# Altium PCB 7Inc Module.PcbDoc (part 2 of 2)
Units mm, origin at the board's own origin, x right, y up, seen from the top; angles counter-clockwise.
Board outline 50 x 50 mm, 4 copper layers (L1, L2, L3, L4), stack 1.57 mm thick; 64 components, 58 nets, 230 pads, 121 vias.
Unrouted connection lines stored in the file: 274.
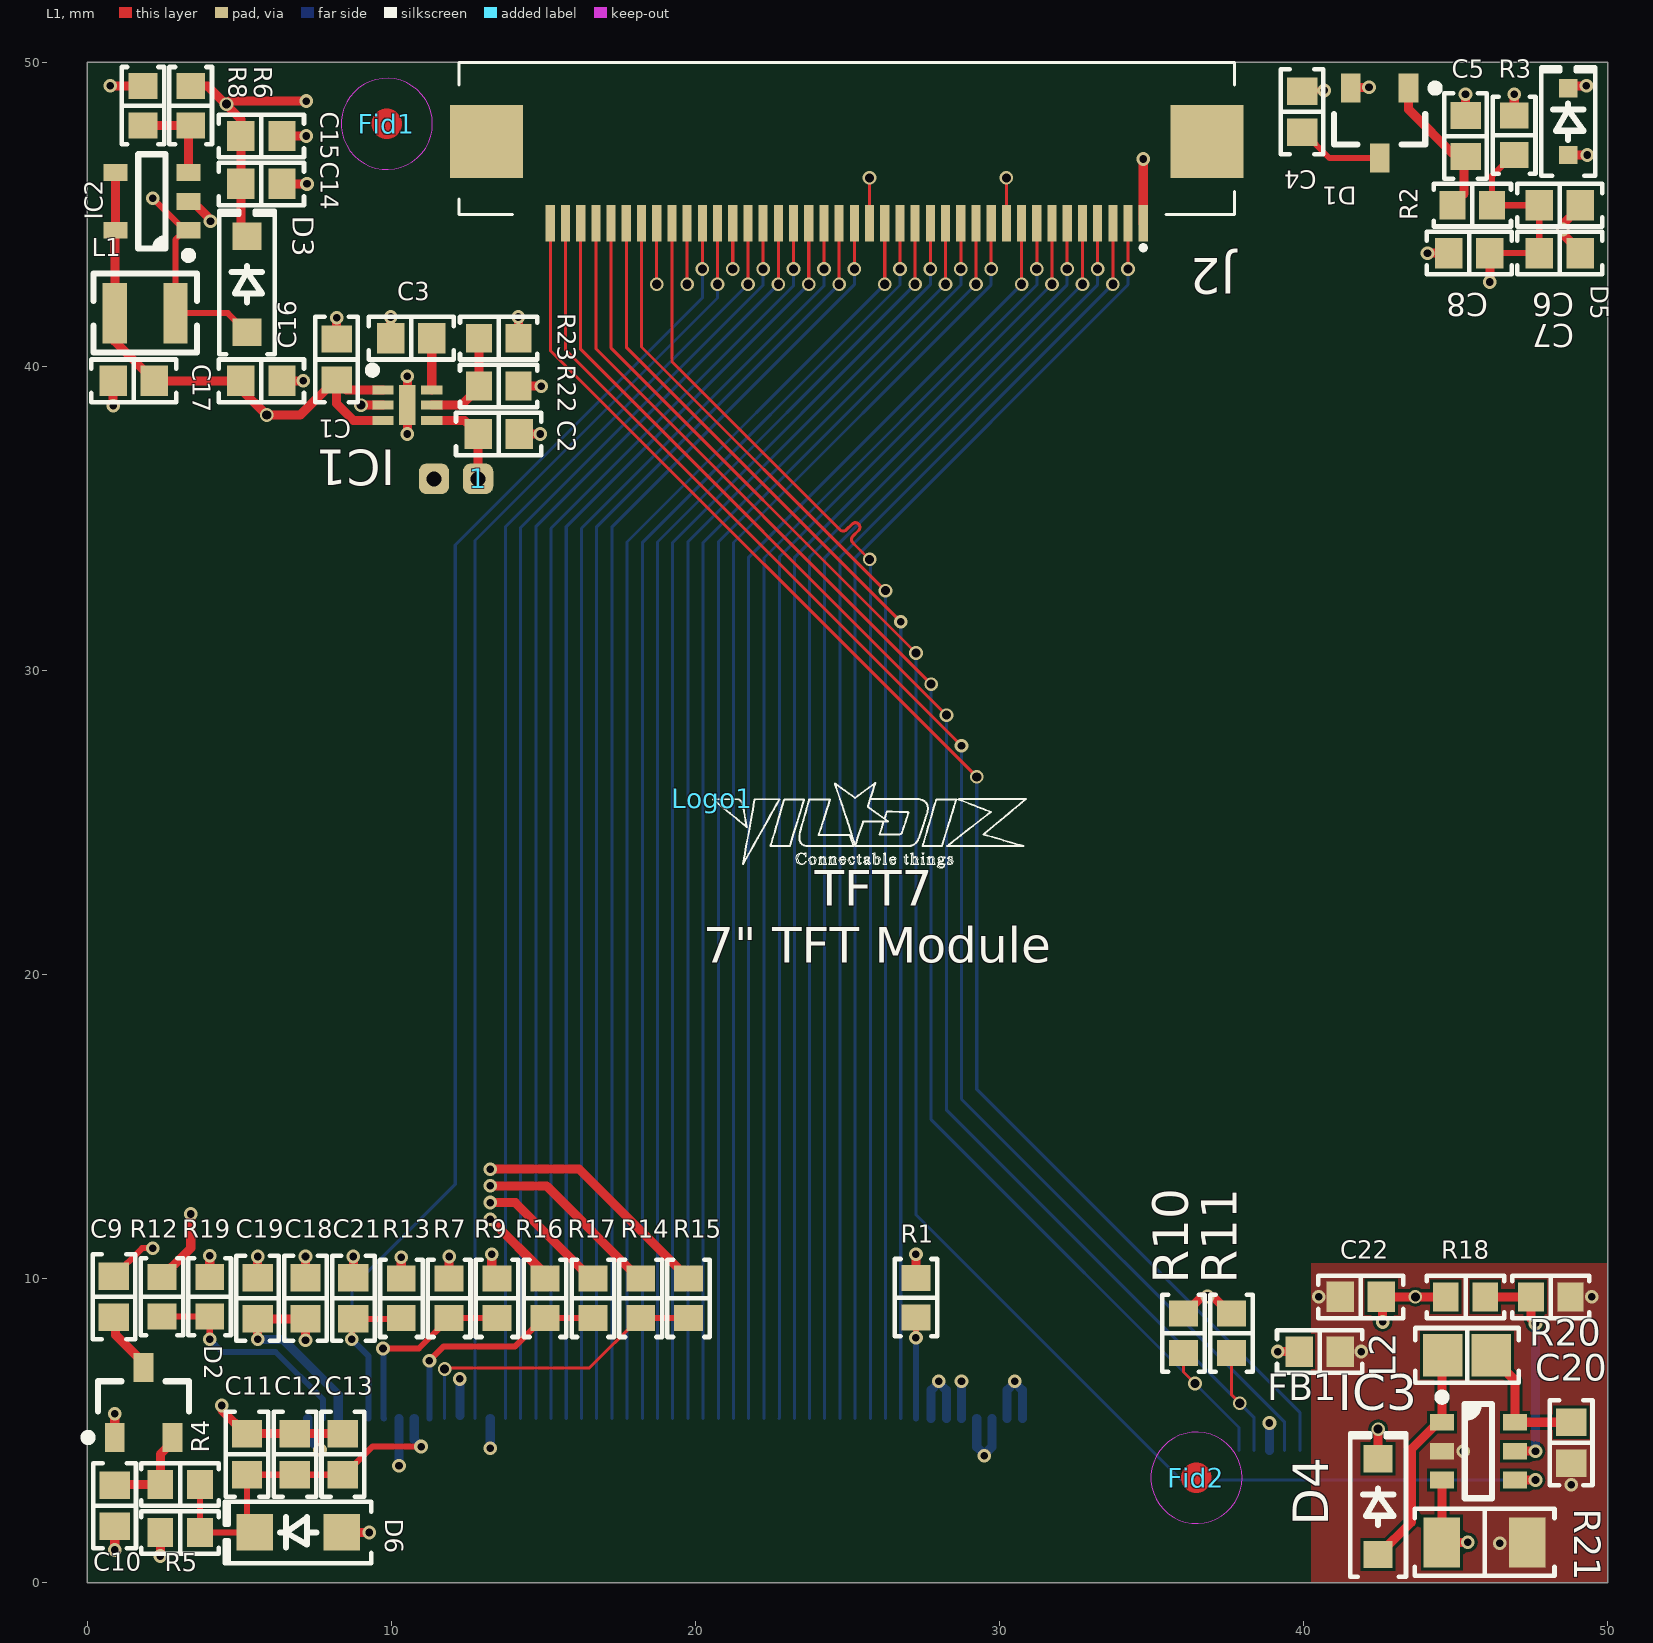
[diagram p0: L1 view]

## Part data (continued)
R3: library part Resistor_Chip, "Ceramic, SMT Capacitor", Case/Package=0603, Case Code (Metric)=1608, Manufacturer=Yageo, Manufacturer Part Number=RC0603FR-076K98L, Max Operating Temperature=155°C, Max Power Dissipation=100mW, Min Operating Temperature=-55°C, Package Quantity=1, Supplier Part Number 1=311-6.98KHRCT-ND, Temperature Coefficient=100ppm/°C, Tolerance=1%, Voltage Rating (DC)=50V, Working Voltage=75V, Case Code (Imperial)=0603, ComponentLink1Description=https://datasheet.ciiva.com/11808/0900766b80f96399-11808081.pdf?src-supplier=RSComponents, ComponentLink1URL=https://datasheet.ciiva.com/11808/0900766b80f96399-11808081.pdf?src-supplier=RSComponents, ComponentLink2Description=https://datasheet.ciiva.com/25906/pyu-rc0603-51-rohs-l-4-25906933.pdf?src-supplier=Avnet+Europe, ComponentLink2URL=https://datasheet.ciiva.com/25906/pyu-rc0603-51-rohs-l-4-25906933.pdf?src-supplier=Avnet+Europe, ComponentLink3Description=https://datasheet.ciiva.com/7660/1868787-7660790.pdf?src-supplier=Element14, ComponentLink3URL=https://datasheet.ciiva.com/7660/1868787-7660790.pdf?src-supplier=Element14, ComponentLink4Description=https://datasheet.ciiva.com/7746/1738695-7746279.pdf?src-supplier=Element14, ComponentLink4URL=https://datasheet.ciiva.com/7746/1738695-7746279.pdf?src-supplier=Element14, ComponentLink5Description=https://datasheet.ciiva.com/7746/1686128-7746280.pdf?src-supplier=Element14, ComponentLink5URL=https://datasheet.ciiva.com/7746/1686128-7746280.pdf?src-supplier=Element14, ComponentLink6Description=https://datasheet.ciiva.com/28386/pyu-rc0603-51-rohs-l-4-28386648.pdf?src-supplier=Avnet+Europe, ComponentLink6URL=https://datasheet.ciiva.com/28386/pyu-rc0603-51-rohs-l-4-28386648.pdf?src-supplier=Avnet+Europe, ComponentLink7Description=https://datasheet.ciiva.com/7746/1738695-7746281.pdf?src-supplier=Element14, ComponentLink7URL=https://datasheet.ciiva.com/7746/1738695-7746281.pdf?src-supplier=Element14, ComponentLink8Description=https://datasheet.ciiva.com/8896/pyu-rc0603-51-rohs-l-4-8896106.pdf?src-supplier=Avnet, ComponentLink8URL=https://datasheet.ciiva.com/8896/pyu-rc0603-51-rohs-l-4-8896106.pdf?src-supplier=Avnet, ComponentLink9Description=https://datasheet.ciiva.com/15189/getdatasheetpartid-404327-15189644.pdf?src-supplier=Verical, ComponentLink9URL=https://datasheet.ciiva.com/15189/getdatasheetpartid-404327-15189644.pdf?src-supplier=Verical, ComponentLink10Description=https://datasheet.ciiva.com/7983/443971-7983613.pdf?src-supplier=Element14, ComponentLink10URL=https://datasheet.ciiva.com/7983/443971-7983613.pdf?src-supplier=Element14, ComponentLink11Description=https://datasheet.ciiva.com/2553/pyu-r-int-thick-7-2553542.pdf?src-supplier=Digi-Key, ComponentLink11URL=https://datasheet.ciiva.com/2553/pyu-r-int-thick-7-2553542.pdf?src-supplier=Digi-Key, ComponentLink12Description=https://datasheet.ciiva.com/2553/pyu-r-int-thick-7-2553543.pdf?src-supplier=Digi-Key, ComponentLink12URL=https://datasheet.ciiva.com/2553/pyu-r-int-thick-7-2553543.pdf?src-supplier=Digi-Key, ComponentLink13Description=https://datasheet.ciiva.com/2553/pyu-r-int-thick-7-2553544.pdf?src-supplier=Digi-Key, ComponentLink13URL=https://datasheet.ciiva.com/2553/pyu-r-int-thick-7-2553544.pdf?src-supplier=Digi-Key, Composition="Thick Film", Depth=0.8mm, Features="Moisture Resistant", Height=0.022inch, Lead Free="Lead Free", Length=0.063inch, Military Standard=Not, Number of Terminations=2, Packaging="Tape and Reel", Power Rating=100mW, Pricing 1="1 = 0,10000, 10 = 0,02300, 100 = 0,00940, 1000 = 0,00421, 2500 = 0,00366 (USD)", Resistance=6.98kR, RoHS=Yes, Stock 1=185868, Supplier 1=Digi-Key, Width=0.031inch
R4: library part Resistor_Chip, "Ceramic, SMT Capacitor", Case/Package=0603, Case Code (Metric)=1608, Manufacturer=Yageo, Manufacturer Part Number=RC0603FR-071K24L, Max Operating Temperature=155°C, Max Power Dissipation=100mW, Min Operating Temperature=-55°C, Package Quantity=1, Supplier Part Number 1=311-1.24KHRCT-ND, Temperature Coefficient=100ppm/°C, Tolerance=1%, Voltage Rating=50V, Case Code (Imperial)=0603, ComponentLink1Description=http://www.mouser.com/ds/2/447/RC0603-272842.pdf?src-supplier=Mouser, ComponentLink1URL=http://www.mouser.com/ds/2/447/RC0603-272842.pdf?src-supplier=Mouser, ComponentLink2Description=http://components.arrow.com/part/dataview/0323_03541353?src-supplier=Arrow+Europe, ComponentLink2URL=http://components.arrow.com/part/dataview/0323_03541353?src-supplier=Arrow+Europe, ComponentLink3Description=http://www.yageo.com/documents/recent/PYu-RC_Group_51_RoHS_L_9.pdf?src-supplier=Digi-Key, ComponentLink3URL=http://www.yageo.com/documents/recent/PYu-RC_Group_51_RoHS_L_9.pdf?src-supplier=Digi-Key, ComponentLink4Description=http://www.yageo.com/documents/recent/PYu-RC0603_51_RoHS_L_4.pdf?src-supplier=Avnet+Europe, ComponentLink4URL=http://www.yageo.com/documents/recent/PYu-RC0603_51_RoHS_L_4.pdf?src-supplier=Avnet+Europe, ComponentLink5Description=http://www.yageo.com/documents/recent/PYu-RC_Group_51_RoHS_L_10.pdf?src-supplier=Digi-Key, ComponentLink5URL=http://www.yageo.com/documents/recent/PYu-RC_Group_51_RoHS_L_10.pdf?src-supplier=Digi-Key, ComponentLink6Description=http://www.yageo.com/documents/recent/PYu-RC0603_51_RoHS_L_4.pdf?src-supplier=Avnet, ComponentLink6URL=http://www.yageo.com/documents/recent/PYu-RC0603_51_RoHS_L_4.pdf?src-supplier=Avnet, ComponentLink7Description=http://www.yageo.com/documents/recent/PYu-RC0603_51_RoHS_L_7.pdf?src-supplier=Future+Electronics, ComponentLink7URL=http://www.yageo.com/documents/recent/PYu-RC0603_51_RoHS_L_7.pdf?src-supplier=Future+Electronics, ComponentLink8Description=https://datasheet.ciiva.com/11809/0900766b80f96399-11809244.pdf?src-supplier=RSComponents, ComponentLink8URL=https://datasheet.ciiva.com/11809/0900766b80f96399-11809244.pdf?src-supplier=RSComponents, ComponentLink9Description=https://datasheet.ciiva.com/2454/pyu-r-int-thick-7-2454258.pdf?src-supplier=Digi-Key, ComponentLink9URL=https://datasheet.ciiva.com/2454/pyu-r-int-thick-7-2454258.pdf?src-supplier=Digi-Key, ComponentLink10Description=https://datasheet.ciiva.com/2454/pyu-r-int-thick-7-2454259.pdf?src-supplier=Digi-Key, ComponentLink10URL=https://datasheet.ciiva.com/2454/pyu-r-int-thick-7-2454259.pdf?src-supplier=Digi-Key, ComponentLink11Description=https://datasheet.ciiva.com/2454/pyu-r-int-thick-7-2454260.pdf?src-supplier=Digi-Key, ComponentLink11URL=https://datasheet.ciiva.com/2454/pyu-r-int-thick-7-2454260.pdf?src-supplier=Digi-Key, Composition="Thick Film", Depth=0.8mm, Features="Moisture Resistant", Height=0.45mm, Lead Free="Lead Free", Length=1.6mm, Military Standard=Not, Mount="Surface Mount", Number of Terminations=2, Packaging="Tape and Reel", Power Rating=100mW, Pricing 1="1 = 0,10000, 10 = 0,02300, 100 = 0,00940, 1000 = 0,00421, 2500 = 0,00366 (USD)", Resistance=1.24kR, RoHS=Yes, Stock 1=189612, Supplier 1=Digi-Key, Termination=SMD/SMT, Voltage Rating (DC)=50V, Width=0.031inch
R5: library part Resistor_Chip, "Ceramic, SMT Capacitor", Case/Package=0603, Manufacturer="Yageo Phycomp", Manufacturer Part Number=RC0603FR-074K99L, Max Operating Temperature=155°C, Min Operating Temperature=-55°C, Power Rating=100mW, Supplier Part Number 1=311-4.99KHRCT-ND, Temperature Coefficient=100ppm/°C, Tolerance=1%, Voltage Rating (DC)=50V, ComponentLink1Description=https://datasheet.ciiva.com/11808/0900766b80f96399-11808081.pdf?src-supplier=RSComponents, ComponentLink1URL=https://datasheet.ciiva.com/11808/0900766b80f96399-11808081.pdf?src-supplier=RSComponents, ComponentLink2Description=https://datasheet.ciiva.com/25906/pyu-rc0603-51-rohs-l-4-25906933.pdf?src-supplier=Avnet+Europe, ComponentLink2URL=https://datasheet.ciiva.com/25906/pyu-rc0603-51-rohs-l-4-25906933.pdf?src-supplier=Avnet+Europe, ComponentLink3Description=https://datasheet.ciiva.com/7660/1868787-7660790.pdf?src-supplier=Element14, ComponentLink3URL=https://datasheet.ciiva.com/7660/1868787-7660790.pdf?src-supplier=Element14, ComponentLink4Description=https://datasheet.ciiva.com/7746/1738695-7746279.pdf?src-supplier=Element14, ComponentLink4URL=https://datasheet.ciiva.com/7746/1738695-7746279.pdf?src-supplier=Element14, ComponentLink5Description=https://datasheet.ciiva.com/7746/1686128-7746280.pdf?src-supplier=Element14, ComponentLink5URL=https://datasheet.ciiva.com/7746/1686128-7746280.pdf?src-supplier=Element14, ComponentLink6Description=https://datasheet.ciiva.com/28386/pyu-rc0603-51-rohs-l-4-28386648.pdf?src-supplier=Avnet+Europe, ComponentLink6URL=https://datasheet.ciiva.com/28386/pyu-rc0603-51-rohs-l-4-28386648.pdf?src-supplier=Avnet+Europe, ComponentLink7Description=https://datasheet.ciiva.com/7746/1738695-7746281.pdf?src-supplier=Element14, ComponentLink7URL=https://datasheet.ciiva.com/7746/1738695-7746281.pdf?src-supplier=Element14, ComponentLink8Description=https://datasheet.ciiva.com/8896/pyu-rc0603-51-rohs-l-4-8896106.pdf?src-supplier=Avnet, ComponentLink8URL=https://datasheet.ciiva.com/8896/pyu-rc0603-51-rohs-l-4-8896106.pdf?src-supplier=Avnet, ComponentLink9Description=https://datasheet.ciiva.com/15189/getdatasheetpartid-404327-15189644.pdf?src-supplier=Verical, ComponentLink9URL=https://datasheet.ciiva.com/15189/getdatasheetpartid-404327-15189644.pdf?src-supplier=Verical, ComponentLink10Description=https://datasheet.ciiva.com/7983/443971-7983613.pdf?src-supplier=Element14, ComponentLink10URL=https://datasheet.ciiva.com/7983/443971-7983613.pdf?src-supplier=Element14, ComponentLink11Description=http://www.farnell.com/datasheets/2167052.pdf?src-supplier=Farnell, ComponentLink11URL=http://www.farnell.com/datasheets/2167052.pdf?src-supplier=Farnell, ComponentLink12Description=http://www.yageo.com/documents/recent/PYu-RC_Group_51_RoHS_L_9.pdf?src-supplier=Digi-Key, ComponentLink12URL=http://www.yageo.com/documents/recent/PYu-RC_Group_51_RoHS_L_9.pdf?src-supplier=Digi-Key, ComponentLink13Description=http://www.yageo.com/documents/recent/PYu-RC_Group_51_RoHS_L_10.pdf?src-supplier=Digi-Key, ComponentLink13URL=http://www.yageo.com/documents/recent/PYu-RC_Group_51_RoHS_L_10.pdf?src-supplier=Digi-Key, ComponentLink14Description=http://www.farnell.com/datasheets/2167052.pdf?src-supplier=Newark, ComponentLink14URL=http://www.farnell.com/datasheets/2167052.pdf?src-supplier=Newark, Depth=0.8mm, Height=0.45mm, Lead Free="Lead Free", Length=1.6mm, Mount="Surface Mount", Number of Pins=2, Packaging="Cut Tape", Pricing 1="1 = 0,10000, 10 = 0,02300, 100 = 0,00940, 1000 = 0,00421, 2500 = 0,00366 (USD)", Resistance=4.99kR, RoHS=Yes, Stock 1=2436445, Supplier 1=Digi-Key, Width=800um
R6: library part Resistor_Chip, "Ceramic, SMT Capacitor", Case/Package=0603, Case Code (Metric)=1608, Manufacturer=Yageo, Manufacturer Part Number=RC0603FR-0715KL, Max Operating Temperature=155°C, Max Power Dissipation=100mW, Min Operating Temperature=-55°C, Package Quantity=1, Supplier Part Number 1=311-15.0KHRCT-ND, Temperature Coefficient=100ppm/°C, Tolerance=1%, Voltage Rating=50V, Case Code (Imperial)=0603, ComponentLink1Description=http://components.arrow.com/part/dataview/44987923S7569258N1174?src-supplier=Arrow, ComponentLink1URL=http://components.arrow.com/part/dataview/44987923S7569258N1174?src-supplier=Arrow, ComponentLink2Description=https://www.verical.com/server-webapp/html/getDatasheet?partID=738121&src-supplier=Verical, ComponentLink2URL=https://www.verical.com/server-webapp/html/getDatasheet?partID=738121&src-supplier=Verical, ComponentLink3Description=https://www.seielect.com/Catalog/SEI-RMCF_RMCP.pdf?src-supplier=Digi-Key, ComponentLink3URL=https://www.seielect.com/Catalog/SEI-RMCF_RMCP.pdf?src-supplier=Digi-Key, ComponentLink4Description=http://www.seielect.com/Catalog/SEI-RMC.pdf?src-supplier=Future+Electronics, ComponentLink4URL=http://www.seielect.com/Catalog/SEI-RMC.pdf?src-supplier=Future+Electronics, ComponentLink5Description=https://www.seielect.com/catalog/SEI-Packaging.pdf?src-supplier=Digi-Key, ComponentLink5URL=https://www.seielect.com/catalog/SEI-Packaging.pdf?src-supplier=Digi-Key, ComponentLink6Description=https://www.seielect.com/catalog/SEI-RMCF_RMCP.pdf?src-supplier=Avnet, ComponentLink6URL=https://www.seielect.com/catalog/SEI-RMCF_RMCP.pdf?src-supplier=Avnet, ComponentLink7Description=http://www.seielect.com/Catalog/SEI-RMCF_RMCP.pdf?src-supplier=Digi-Key, ComponentLink7URL=http://www.seielect.com/Catalog/SEI-RMCF_RMCP.pdf?src-supplier=Digi-Key, ComponentLink8Description=http://components.arrow.com/part/dataview/44987954S7631231N1174?src-supplier=Arrow, ComponentLink8URL=http://components.arrow.com/part/dataview/44987954S7631231N1174?src-supplier=Arrow, ComponentLink9Description=http://www.mouser.com/ds/2/447/RC0603-272842.pdf?src-supplier=Mouser, ComponentLink9URL=http://www.mouser.com/ds/2/447/RC0603-272842.pdf?src-supplier=Mouser, ComponentLink10Description=http://components.arrow.com/part/dataview/0323_03538290?src-supplier=Arrow+Europe, ComponentLink10URL=http://components.arrow.com/part/dataview/0323_03538290?src-supplier=Arrow+Europe, ComponentLink11Description=http://www.yageo.com/documents/recent/PYu-RC_Group_51_RoHS_L_9.pdf?src-supplier=Digi-Key, ComponentLink11URL=http://www.yageo.com/documents/recent/PYu-RC_Group_51_RoHS_L_9.pdf?src-supplier=Digi-Key, ComponentLink12Description=http://www.yageo.com/documents/recent/PYu-RC_Group_51_RoHS_L_10.pdf?src-supplier=Digi-Key, ComponentLink12URL=http://www.yageo.com/documents/recent/PYu-RC_Group_51_RoHS_L_10.pdf?src-supplier=Digi-Key, ComponentLink13Description=http://www.yageo.com/documents/recent/PYu-RC0603_51_RoHS_L_7.pdf?src-supplier=Future+Electronics, ComponentLink13URL=http://www.yageo.com/documents/recent/PYu-RC0603_51_RoHS_L_7.pdf?src-supplier=Future+Electronics, ComponentLink14Description=https://datasheet.ciiva.com/2453/pyu-r-int-thick-7-2453907.pdf?src-supplier=Digi-Key, ComponentLink14URL=https://datasheet.ciiva.com/2453/pyu-r-int-thick-7-2453907.pdf?src-supplier=Digi-Key, ComponentLink15Description=https://datasheet.ciiva.com/2453/pyu-r-int-thick-7-2453908.pdf?src-supplier=Digi-Key, ComponentLink15URL=https://datasheet.ciiva.com/2453/pyu-r-int-thick-7-2453908.pdf?src-supplier=Digi-Key, ComponentLink16Description=https://datasheet.ciiva.com/2453/pyu-r-int-thick-7-2453909.pdf?src-supplier=Digi-Key, ComponentLink16URL=https://datasheet.ciiva.com/2453/pyu-r-int-thick-7-2453909.pdf?src-supplier=Digi-Key, ComponentLink17Description=https://datasheet.ciiva.com/15189/getdatasheetpartid-327895-15189613.pdf?src-supplier=Verical, ComponentLink17URL=https://datasheet.ciiva.com/15189/getdatasheetpartid-327895-15189613.pdf?src-supplier=Verical, Composition="Thick Film", Depth=0.8mm, Features="Moisture Resistant", Height=0.022inch, Lead Free="Lead Free", Length=1.6mm, Military Standard=Not, Number of Pins=2, Number of Terminations=2, Packaging="Tape and Reel", Power Rating=100mW, Pricing 1="1 = 0,10000, 10 = 0,02300, 100 = 0,00940, 1000 = 0,00421, 2500 = 0,00366 (USD)", REACH SVHC=Unknown, Resistance=15kR, RoHS=Yes, Stock 1=3899647, Supplier 1=Digi-Key, Termination=SMD/SMT, Voltage Rating (DC)=50V, Width=0.031inch
R7: library part Resistor_Chip, "Ceramic, SMT Capacitor", Case/Package=0603, Case Code (Metric)=1608, Manufacturer=Yageo, Manufacturer Part Number=RC0603FR-07910RL, Max Operating Temperature=155°C, Max Power Dissipation=100mW, Min Operating Temperature=-55°C, Package Quantity=1, Supplier Part Number 1=311-910HRCT-ND, Temperature Coefficient=100ppm/°C, Tolerance=1%, Voltage Rating=50V, Case Code (Imperial)=0603, ComponentLink1Description=https://datasheet.ciiva.com/8890/pyu-rc0603-51-rohs-l-4-8890984.pdf?src-supplier=Avnet, ComponentLink1URL=https://datasheet.ciiva.com/8890/pyu-rc0603-51-rohs-l-4-8890984.pdf?src-supplier=Avnet, ComponentLink2Description=https://datasheet.ciiva.com/12577/rc0603-272842-12577401.pdf?src-supplier=Mouser, ComponentLink2URL=https://datasheet.ciiva.com/12577/rc0603-272842-12577401.pdf?src-supplier=Mouser, ComponentLink3Description=https://datasheet.ciiva.com/2455/pyu-r-int-thick-7-2455284.pdf?src-supplier=Digi-Key, ComponentLink3URL=https://datasheet.ciiva.com/2455/pyu-r-int-thick-7-2455284.pdf?src-supplier=Digi-Key, ComponentLink4Description=https://datasheet.ciiva.com/2455/pyu-r-int-thick-7-2455286.pdf?src-supplier=Digi-Key, ComponentLink4URL=https://datasheet.ciiva.com/2455/pyu-r-int-thick-7-2455286.pdf?src-supplier=Digi-Key, ComponentLink5Description=https://datasheet.ciiva.com/12558/rc0603-272842-12558745.pdf?src-supplier=Mouser, ComponentLink5URL=https://datasheet.ciiva.com/12558/rc0603-272842-12558745.pdf?src-supplier=Mouser, ComponentLink6Description=https://datasheet.ciiva.com/2455/pyu-r-int-thick-7-2455285.pdf?src-supplier=Digi-Key, ComponentLink6URL=https://datasheet.ciiva.com/2455/pyu-r-int-thick-7-2455285.pdf?src-supplier=Digi-Key, Composition="Thick Film", Depth=0.8mm, Features="Moisture Resistant", Height=0.022inch, Lead Free="Lead Free", Length=1.6mm, Military Standard=Not, Number of Terminations=2, Packaging="Tape and Reel", Power Rating=100mW, Pricing 1="1 = 0,10000, 10 = 0,02300, 100 = 0,00940, 1000 = 0,00421, 2500 = 0,00366 (USD)", Resistance=910R, RoHS=Yes, Stock 1=1223459, Supplier 1=Digi-Key, Termination=SMD/SMT, Voltage Rating (DC)=50V, Width=0.031inch
R14 R15 R16 R17: library part Resistor_Chip, "Ceramic, SMT Capacitor", Case/Package=0603, Case Code (Metric)=1608, Current Rating=1A, Manufacturer="Stackpole Electronics", Manufacturer Part Number=RMCF0603ZT0R00, Max Operating Temperature=155°C, Max Power Dissipation=100mW, Min Operating Temperature=-55°C, Supplier Part Number 1=RMCF0603ZT0R00CT-ND, Working Voltage=75V, Case Code (Imperial)=0603, ComponentLink1Description=https://www.seielect.com/catalog/SEI-Packaging.pdf?src-supplier=Avnet, ComponentLink1URL=https://www.seielect.com/catalog/SEI-Packaging.pdf?src-supplier=Avnet, ComponentLink2Description=https://www.seielect.com/catalog/SEI-Packaging.pdf?src-supplier=Verical, ComponentLink2URL=https://www.seielect.com/catalog/SEI-Packaging.pdf?src-supplier=Verical, ComponentLink3Description=https://www.seielect.com/catalog/SEI-Packaging.pdf?src-supplier=Arrow, ComponentLink3URL=https://www.seielect.com/catalog/SEI-Packaging.pdf?src-supplier=Arrow, ComponentLink4Description=https://www.seielect.com/catalog/SEI-Packaging.pdf?src-supplier=Digi-Key, ComponentLink4URL=https://www.seielect.com/catalog/SEI-Packaging.pdf?src-supplier=Digi-Key, ComponentLink5Description=https://www.seielect.com/Catalog/SEI-RMCF_RMCP.pdf?src-supplier=Digi-Key, ComponentLink5URL=https://www.seielect.com/Catalog/SEI-RMCF_RMCP.pdf?src-supplier=Digi-Key, ComponentLink6Description=https://www.seielect.com/catalog/SEI-RMCF_RMCP.pdf?src-supplier=Avnet+Asia, ComponentLink6URL=https://www.seielect.com/catalog/SEI-RMCF_RMCP.pdf?src-supplier=Avnet+Asia, ComponentLink7Description=http://www.seielect.com/catalog/sei-rmc.pdf?src-supplier=Future+Electronics, ComponentLink7URL=http://www.seielect.com/catalog/sei-rmc.pdf?src-supplier=Future+Electronics, ComponentLink8Description=https://www.seielect.com/catalog/SEI-Packaging.pdf?src-supplier=Future+Electronics, ComponentLink8URL=https://www.seielect.com/catalog/SEI-Packaging.pdf?src-supplier=Future+Electronics, Composition="Thick Film", Contact Plating=Tin, Depth=0.8mm, Features="Automotive AEC-Q200", Height=0.022inch, Lead Free="Lead Free", Length=1.55mm, Military Standard=Not, Mount="Surface Mount", NC=NC, Number of Terminations=2, Packaging="Tape and Reel", Power Rating=100mW, Pricing 1="1 = 0,10000, 10 = 0,01600, 25 = 0,01160, 50 = 0,00880, 100 = 0,00640, 250 = 0,00492, 500 = 0,00392, 1000 = 0,00289 (USD)", Radiation Hardening=No, Resistance=0mR, RoHS=Yes, Stock 1=3894946, Supplier 1=Digi-Key, Width=0.031inch
R18: library part Resistor_Chip, "Ceramic, SMT Capacitor", Case/Package=0603, Case Code (Metric)=1608, Manufacturer=Yageo, Manufacturer Part Number=RC0603FR-0747KL, Max Operating Temperature=155°C, Max Power Dissipation=100mW, Min Operating Temperature=-55°C, Package Quantity=1, Supplier Part Number 1=311-47.0KHRCT-ND, Temperature Coefficient=100ppm/°C, Tolerance=1%, Voltage Rating=50V, Case Code (Imperial)=0603, ComponentLink1Description=http://www.farnell.com/datasheets/443971.pdf?src-supplier=Element14, ComponentLink1URL=http://www.farnell.com/datasheets/443971.pdf?src-supplier=Element14, ComponentLink2Description=http://www.yageo.com/documents/recent/PYu-RC_Group_51_RoHS_L_10.pdf?src-supplier=Digi-Key, ComponentLink2URL=http://www.yageo.com/documents/recent/PYu-RC_Group_51_RoHS_L_10.pdf?src-supplier=Digi-Key, Composition="Thick Film", Depth=0.8mm, Features="Moisture Resistant", Height=0.022inch, Lead Free="Lead Free", Length=1.6mm, Military Standard=Not, Number of Pins=2, Number of Terminations=2, Packaging="Tape and Reel", Power Rating=100mW, Pricing 1="1 = 0,10000, 10 = 0,02400, 100 = 0,00970, 1000 = 0,00437, 2500 = 0,00379 (USD)", REACH SVHC=Unknown, Resistance=47kR, RoHS=Yes, Stock 1=12336896, Supplier 1=Digi-Key, Termination=SMD/SMT, Voltage Rating (DC)=50V, Width=0.031inch
R20: library part Resistor_Chip, "Ceramic, SMT Capacitor", Case/Package=0603, Case Code (Metric)=1608, Manufacturer=Yageo, Manufacturer Part Number=RC0603FR-0768KL, Max Operating Temperature=155°C, Max Power Dissipation=100mW, Min Operating Temperature=-55°C, Package Quantity=1, Supplier Part Number 1=311-68.0KHRCT-ND, Temperature Coefficient=100ppm/°C, Tolerance=1%, Voltage Rating=50V, Case Code (Imperial)=0603, ComponentLink1Description=http://www.yageo.com/documents/recent/PYu-RC_Group_51_RoHS_L_10.pdf?src-supplier=Digi-Key, ComponentLink1URL=http://www.yageo.com/documents/recent/PYu-RC_Group_51_RoHS_L_10.pdf?src-supplier=Digi-Key, ComponentLink2Description=http://documents.rs-components.com/techlib://itc_doclist_GB.htm?stockno=5048243&src-supplier=RSComponents, ComponentLink2URL=http://documents.rs-components.com/techlib://itc_doclist_GB.htm?stockno=5048243&src-supplier=RSComponents, ComponentLink3Description=http://www.yageo.com/documents/recent/PYu-RC_Group_51_RoHS_L_9.pdf?src-supplier=Digi-Key, ComponentLink3URL=http://www.yageo.com/documents/recent/PYu-RC_Group_51_RoHS_L_9.pdf?src-supplier=Digi-Key, ComponentLink4Description=http://www.farnell.com/datasheets/1868787.pdf?src-supplier=Element14, ComponentLink4URL=http://www.farnell.com/datasheets/1868787.pdf?src-supplier=Element14, ComponentLink5Description=http://www.farnell.com/datasheets/443971.pdf?src-supplier=Element14, ComponentLink5URL=http://www.farnell.com/datasheets/443971.pdf?src-supplier=Element14, ComponentLink6Description=http://www.farnell.com/datasheets/2167052.pdf?src-supplier=Element14, ComponentLink6URL=http://www.farnell.com/datasheets/2167052.pdf?src-supplier=Element14, Composition="Thick Film", Depth=0.8mm, Features="Moisture Resistant", Height=0.022inch, Lead Free="Lead Free", Length=0.063inch, Number of Pins=2, Number of Terminations=2, Packaging="Tape and Reel", Power Rating=100mW, Pricing 1="1 = 0,10000, 10 = 0,02400, 100 = 0,00970, 1000 = 0,00437, 2500 = 0,00379 (USD)", REACH SVHC=Unknown, Resistance=68kR, RoHS=Yes, Stock 1=4262894, Supplier 1=Digi-Key, Termination=SMD/SMT, Voltage Rating (DC)=50V, Width=0.031inch
R21: library part Resistor_Chip, "Ceramic, SMT Capacitor", Case/Package=1206, Case Code (Metric)=3216, Manufacturer=Rohm, Manufacturer Part Number=ESR18EZPJ5R6, Max Operating Temperature=155°C, Max Power Dissipation=333mW, Min Operating Temperature=-55°C, Package Quantity=1, Supplier Part Number 1=RHM5.6ICT-ND, Temperature Coefficient=200ppm/°C, Tolerance=5%, Case Code (Imperial)=1206, ComponentLink1Description=https://datasheet.ciiva.com/14924/esr-14924874.pdf?src-supplier=Digi-Key, ComponentLink1URL=https://datasheet.ciiva.com/14924/esr-14924874.pdf?src-supplier=Digi-Key, ComponentLink2Description=https://datasheet.ciiva.com/14930/esr-14930446.pdf?src-supplier=Digi-Key, ComponentLink2URL=https://datasheet.ciiva.com/14930/esr-14930446.pdf?src-supplier=Digi-Key, Composition="Thick Film", Features="Automotive AEC-Q200", Height=0.026inch, Length=0.126inch, Number of Terminations=2, Packaging="Tape and Reel", Pricing 1="1 = 0,16000, 10 = 0,13300, 100 = 0,05200, 1000 = 0,02178, 2500 = 0,01996 (USD)", Resistance=5.6R, RoHS=Yes, Stock 1=5182, Supplier 1=Digi-Key, Width=0.063inch
R22: library part Resistor_Chip, "Ceramic, SMT Capacitor", Case/Package=0603, Case Code (Metric)=1608, Manufacturer=Yageo, Manufacturer Part Number=RC0603FR-0714KL, Max Operating Temperature=155°C, Max Power Dissipation=100mW, Min Operating Temperature=-55°C, Package Quantity=1, Supplier Part Number 1=311-14.0KHRCT-ND, Temperature Coefficient=100ppm/°C, Tolerance=1%, Voltage Rating=75V, Voltage Rating (DC)=50V, Case Code (Imperial)=0603, ComponentLink1Description=https://datasheet.ciiva.com/15189/getdatasheetpartid-325152-15189610.pdf?src-supplier=Verical, ComponentLink1URL=https://datasheet.ciiva.com/15189/getdatasheetpartid-325152-15189610.pdf?src-supplier=Verical, ComponentLink2Description=https://datasheet.ciiva.com/2455/pyu-r-int-thick-7-2455089.pdf?src-supplier=Digi-Key, ComponentLink2URL=https://datasheet.ciiva.com/2455/pyu-r-int-thick-7-2455089.pdf?src-supplier=Digi-Key, ComponentLink3Description=https://datasheet.ciiva.com/2455/pyu-r-int-thick-7-2455090.pdf?src-supplier=Digi-Key, ComponentLink3URL=https://datasheet.ciiva.com/2455/pyu-r-int-thick-7-2455090.pdf?src-supplier=Digi-Key, ComponentLink4Description=https://datasheet.ciiva.com/2455/pyu-r-int-thick-7-2455091.pdf?src-supplier=Digi-Key, ComponentLink4URL=https://datasheet.ciiva.com/2455/pyu-r-int-thick-7-2455091.pdf?src-supplier=Digi-Key, Composition="Thick Film", Depth=0.8mm, Features="Moisture Resistant", Height=0.022inch, Lead Free="Lead Free", Length=1.6mm, Military Standard=Not, Number of Terminations=2, Packaging="Tape and Reel", Power Rating=100mW, Pricing 1="1 = 0,10000, 10 = 0,02300, 100 = 0,00940, 1000 = 0,00421, 2500 = 0,00366 (USD)", Resistance=14kR, RoHS=Yes, Stock 1=622097, Supplier 1=Digi-Key, Termination=SMD/SMT, Weight=7.1E-05oz, Width=0.031inch
R23: library part Resistor_Chip, "Ceramic, SMT Capacitor", Case/Package=0603, Case Code (Metric)=1608, Manufacturer="Stackpole Electronics", Manufacturer Part Number=RNCP0603FTD10K0, Max Operating Temperature=155°C, Max Power Dissipation=125mW, Min Operating Temperature=-55°C, Supplier Part Number 1=RNCP0603FTD10K0CT-ND, Temperature Coefficient=100ppm/°C, Tolerance=1%, Case Code (Imperial)=0603, Composition="Thin Film", Contact Plating=Matte,Tin, Features="Anti-Sulfur,Moisture Resistant", Height=0.02inch, Lead Free="Lead Free", Length=0.059inch, Mount="Surface Mount", Number of Terminations=2, Packaging="Tape and Reel", Pricing 1="1 = 0,10000, 10 = 0,06700, 100 = 0,02730, 1000 = 0,01224, 2500 = 0,01063 (USD)", Radiation Hardening=No, Resistance=10kR, RoHS=Yes, Stock 1=183083, Supplier 1=Digi-Key, Width=0.031inch

## Free pads (board coordinates)
  rrect50% 1x1 hole 0.5: GND(11.4,36.3)

## Via types
v1: diameter 0.45, hole 0.25, L1 to L4, tented both sides, 75 vias
v2: diameter 0.45, hole 0.3, L1 to L4, tented both sides, 46 vias

## Nets (pads, with @x,y where several pads share a name; then routed paths per layer and width w, separated by ;. In a path a pad name is that pad's centre, name@x,y a point inside that pad or via, vN(x,y) a via of type N, cw(c..) or ccw(c..) an arc to the next point about the centre after c; other vN are vias at no path point)
3v3: 1.1 C2.2 C18.2 C19.2 IC1.4 J1.6 J1.7 J1.46 J6.3 R10.1 R11.1 R12.1 R13.2 R14.1 R16.1 R22.2 | length 28.8
  L1 w0.3: R12.1 2.5,10.05 2.775,10.325 2.775,10.375 3.4,11 v1(3.4,12.125) ; v1(5.6,8) C19.2 C18.2 v1(7.175,7.975) ; R13.2 v1(10.325,10.7) ; IC1.4 12.4,38.225 C2.2 ; 1.1 C2.2 ; C2.2@12.85,37.825 C2.2 ; v1(13.25,11.95) 15.05,10.15 R16.1 ; v1(13.25,13.05) 15.1,13.05 18.15,10 R14.1 ; R22.2 v1(14.925,39.35) ; R10.1 36.1,8.85 36.663,9.413 37.012,9.413 37.575,8.85 R11.1
  L4 w0.3: v1(5.6,8) 6.425,8 8.25,6.175 J1.46 ; J1.7 27.75,6.334 v1@28,6.584 ; v1(28,6.625) v1@28,6.584 ; J1.6 28.25,6.334 v1@28,6.584 ; J6.3 v1(38.875,5.25)
  other v2: 36.838,9.413
5V: C1.2 C16.2 C17.2 C20.2 IC1.1 IC1.3 IC2.4 IC2.5 IC3.6 J2.1 L1.1 L2.1 | length 58.8
  L1 w0.3: IC2.4 IC2.5 0.913,44.462 0.913,41.763 L1.1 0.9,40.825 C17.2 C16.2 5.05,39.25 v2(5.9,38.4) 7,38.4 8.15,39.55 C1.2 ; IC1.3 8.75,38.225 8.2,38.775 C1.2 ; IC1.1 8.525,39.225 C1.2 ; J2.1 v1(34.725,46.819) ; L2.1 46.175,7.425 46.95,6.65 IC3.6 C20.2
  L2 w0.3: v2(5.9,38.4) 5.9,40.6 12.119,46.819 v1(34.725,46.819)
20V: C14.2 C15.2 D2.1 D3.2 R6.2 R7.1 | length 98.1
  L1 w0.3: D2.1 v1(0.9,5.55) ; R6.2 3.95,49.225 5.05,48.125 C15.2 C14.2 5.05,44.475 D3.2 ; v2(4.575,48.625) 4.675,48.725 v1(7.2,48.725) ; R7.1 v1(11.9,10.725)
  L2 w0.3: v1(0.9,5.55) 1.625,6.275 1.625,11.294 1.625,45.675 v2(4.575,48.625) ; v1(7.2,48.725) 3.1,44.625 3.1,19.525 v1(11.9,10.725)
AVDD: J1.43 R7.2 R9.1 | length 6.5
  L1 w0.2: v1(9.725,7.7) 10.9,7.7 R7.2 R9.1
  L4 w0.2: v1(9.725,7.7) 9.738,7.687 9.738,5.412 J1.43
B0: J1.19 J2.9 | length 43
  L1 w0.1: v2(30.725,42.7) J2.9
  L4 w0.1: J1.19 21.75,33.725 v2(30.725,42.7)
B1: J1.18 J2.8 | length 43
  L1 w0.1: v2(31.225,43.2) J2.8
  L4 w0.1: J1.18 22.25,33.7 31.225,42.675 v2(31.225,43.2)
B2: J1.17 J2.7 | length 43
  L1 w0.1: v2(31.725,42.7) J2.7
  L4 w0.1: J1.17 22.764,5.414 22.764,33.739 v2(31.725,42.7)
B3: J1.16 J2.6 | length 43
  L1 w0.1: v2(32.225,43.2) J2.6
  L4 w0.1: J1.16 23.25,33.71 32.225,42.685 v2(32.225,43.2)
B4: J1.15 J2.5 | length 43
  L1 w0.1: v2(32.725,42.7) J2.5
  L4 w0.1: J1.15 23.75,33.725 v2(32.725,42.7)
B5: J1.14 J2.4 | length 43
  L1 w0.1: v2(33.225,43.2) J2.4
  L4 w0.1: J1.14 24.25,33.71 33.225,42.685 v2(33.225,43.2)
B6: J1.13 J2.3 | length 43
  L1 w0.1: v2(33.725,42.7) J2.3
  L4 w0.1: J1.13 24.75,33.725 v2(33.725,42.7)
B7: J1.12 J2.2 | length 43
  L1 w0.1: v2(34.225,43.2) J2.2
  L4 w0.1: J1.12 25.25,33.71 34.225,42.685 v2(34.225,43.2)
BL: IC3.4 J2.36 | length 61.5
  L1 w0.1: J2.36 17.225,40.6 v2(27.25,30.575)
  L1 w0.3: IC3.4 v1(47.625,3.375)
  L4 w0.1: v2(27.25,30.575) 27.25,12.1 35.975,3.375 v1(47.625,3.375)
  L4 w0.3: v1@47.6,3.35 v1(47.625,3.375)
BL_A: C22.2 D4.2 J1.1 J1.2 R18.2 | length 24.3
  L1 w0.3: D4.2 v2(42.45,5.05) ; v1(42.6,8.575) 42.6,9.35 C22.2 v2(43.675,9.4) R18.2
  L2 w0.3: v1(30.5,6.625) 32.45,8.575 v1(42.6,8.575) ; v2(42.45,5.05) 43.675,6.275 v2(43.675,9.4)
  L4 w0.3: J1.2 30.25,6.334 v1@30.5,6.584 ; v1(30.5,6.625) v1@30.5,6.584 ; J1.1 30.75,6.334 v1@30.5,6.584
BL_K: IC3.3 J1.3 J1.4 R21.2 | length 22.6
  L1 w0.3: IC3.3 R21.2 v1(45.4,1.325)
  L2 w0.3: v1(29.5,4.175) 32.35,1.325 v1(45.4,1.325)
  L4 w0.3: J1.4 29.25,4.466 29.5,4.216 29.75,4.466 J1.3
BLGND: C20.1 C22.1 FB1.2 IC3.2 R20.1 R21.1 | length 0
  L1 w0.3: R21.1@47.325,1.3 R21.1
  other v1: 46.45,1.3 48.8,3.225 45.25,4.325 41.9,7.6 40.5,9.4 49.475,9.4
CLK: J1.37 J2.29 | length 42.6
  L1 w0.1: v2(20.725,42.7) J2.29
  L4 w0.1: J1.37 12.75,34.275 20.725,42.25 v2(20.725,42.7)
DE: J1.9 J2.35 | length 43
  L1 w0.1: J2.35 17.725,40.625 v1(26.75,31.6)
  L4 w0.1: J1.9 v1(26.75,31.6)
DISP: C21.2 J1.44 J2.30 R13.1 | length 46.6
  L1 w0.1: v2(20.225,43.2) J2.30
  L1 w0.2: v1(8.7,8) 8.7,8.625 C21.2 10.3,8.675 R13.1
  L4 w0.1: v1(8.7,8) 8.7,9.7 12.1,13.1 12.1,34.125 20.225,42.25 v2(20.225,43.2)
  L4 w0.2: v1(8.7,8) 9.25,7.45 J1.44
DITH: J1.47 R12.2 R19.1 | length 7.5
  L1 w0.2: R12.2 R19.1 v1(4.025,8)
  L4 w0.2: v1(4.025,8) 4.439,7.586 6.189,7.586 7.75,6.025 J1.47
G0: J1.27 J2.18 | length 42.8
  L1 w0.1: v2(26.225,42.7) J2.18
  L4 w0.1: J1.27 17.75,34.225 v2(26.225,42.7)
G1: J1.26 J2.17 | length 42.8
  L1 w0.1: v2(26.725,43.2) J2.17
  L4 w0.1: J1.26 18.25,34.2 26.725,42.675 v2(26.725,43.2)
G2: J1.25 J2.16 | length 42.8
  L1 w0.1: v2(27.225,42.7) J2.16
  L4 w0.1: J1.25 18.75,34.225 v2(27.225,42.7)
G3: J1.24 J2.15 | length 42.8
  L1 w0.1: v2(27.725,43.2) J2.15
  L4 w0.1: J1.24 19.25,34.21 27.725,42.685 v2(27.725,43.2)
G4: J1.23 J2.14 | length 42.8
  L1 w0.1: v2(28.225,42.7) J2.14
  L4 w0.1: J1.23 19.75,34.225 v2(28.225,42.7)
G5: J1.22 J2.13 | length 42.8
  L1 w0.1: v2(28.725,43.2) J2.13
  L4 w0.1: J1.22 20.25,34.2 28.725,42.675 v2(28.725,43.2)
G6: J1.21 J2.12 | length 42.8
  L1 w0.1: v2(29.225,42.7) J2.12
  L4 w0.1: J1.21 20.75,34.225 v2(29.225,42.7)
G7: J1.20 J2.11 | length 42.8
  L1 w0.1: v2(29.725,43.2) J2.11
  L4 w0.1: J1.20 21.25,34.21 29.725,42.685 v2(29.725,43.2)
GND: C1.1 C2.1 C3.1 C5.1 C6.1 C7.1 C8.1 C10.1 C11.1 C12.1 C13.1 C14.1 C15.1 C16.1 C17.1 C18.1 C19.1 C21.1 D1.3 D5.2 D6.1 FB1.1 IC1.2 IC1.7 IC2.2 J1.5 J1.36 J1.38 J1.48 J1.MP1 J1.MP2 J2.10 J2.19 J2.28 J2.31 J2.33 J6.6 pad.GND R1.1 R3.1 R5.1 R8.2 R9.2 R15.1 R17.1 R19.2 R23.2 | length 54
  L1 w0.1: v2(18.725,42.7) J2.33 ; v2(19.725,42.7) J2.31 ; v2(21.225,43.2) J2.28 ; J2.19 v2(25.725,46.2) ; J2.10 v2(30.225,46.2)
  L1 w0.3: v1(0.75,49.225) R8.2 ; v1(0.85,38.7) C17.1 ; v1(0.9,1.075) C10.1 ; v1(2.4,0.875) R5.1 ; IC2.2@3.388,45.425 3.45,45.425 4.021,44.854 4.021,44.806 v1(4.05,44.777) ; R19.2 v1(4.025,10.75) ; v1(4.425,5.825) 4.425,5.675 5.2,4.9 C11.1 C12.1 7.613,4.9 ; C19.1 v1(5.6,10.725) ; C16.1 v1(7.1,39.525) ; C14.1 v1(7.225,46) ; C15.1 v1(7.2,47.575) ; C18.1 v1(7.175,10.725) ; v1(7.65,4.375) 7.621,4.404 7.621,4.741 7.613,4.75 7.613,4.9 ; C1.1 v1(8.2,41.6) ; D6.1 v1(9.275,1.65) ; C13.1 7.613,4.9 ; C21.1 v1(8.75,10.725) ; v2(9,38.725) IC1.2 ; C3.1 v1(9.975,41.625) ; IC1.7@10.5,38.75 IC1.7 ; v1(10.525,37.775) IC1.7 ; v1(10.525,39.675) IC1.7 ; v1(13.25,12.5) 14.075,12.5 16.575,10 R17.1 ; v1(13.25,13.6) 16.175,13.6 R15.1 ; v1(13.3,10.8) 13.3,10.175 R9.2 ; R23.2 v1(14.175,41.625) ; C2.1 v1(14.9,37.775) ; R1.1 v1(27.25,10.8) ; v1@28.725,6.6 v1(28.75,6.625) ; v1(39.15,7.6) FB1.1 ; D1.3 41.575,49.175 v1(42.15,49.175) ; v1(44.075,43.725) C8.1 ; C5.1 v1(45.325,48.95) ; R3.1 v1(46.925,48.95) ; v1(48.525,44.5) 48.554,44.471 48.554,44.321 49.002,43.873 49.002,43.823 C7.1 ; v1@48.554,44.704 49.1,45.25 C6.1 ; D5.2 48.775,49.225 v1(49.3,49.225)
  L4 w0.3: J1.48 7.25,4.775 v1(7.65,4.375) ; J1.38@12.25,5.501 v1(12.25,6.7) ; v1(13.25,4.425) J1.36 ; J1.5 v1(28.75,6.625)
HSYNC: J1.11 J2.32 | length 42.9
  L1 w0.1: J2.32 19.225,40.15 24.75,34.625 ccw(c24.856,34.731) 24.962,34.625 25.152,34.815 cw(c25.258,34.709) 25.364,34.815 cw(c25.258,34.709) 25.364,34.603 25.174,34.413 ccw(c25.28,34.307) 25.174,34.201 25.28,34.095 25.313,34.062 25.723,33.652 v2(25.726,33.652)
  L4 w0.1: v2(25.726,33.652) 25.75,33.628 J1.11
INT/YD: J2.40 J6.5 | length 50.6
  L1 w0.1: J2.40 15.225,40.525 v2(29.25,26.5)
  L4 w0.1: v2(29.25,26.5) 29.25,16.225 39.875,5.6 J6.5
L/R: J1.39 R14.2 R15.2 | length 10.3
  L1 w0.1: v2(11.75,7.025) 11.789,7.064 16.514,7.064 18.15,8.7 R14.2
  L1 w0.2: R14.2 R15.2
  L4 w0.1: J1.39 v2(11.75,7.025)
NetC3_2: C3.2 IC1.6 | length 1.7
  L1 w0.3: IC1.6 C3.2
NetC4_1: C4.1 D1.2 | length 2.9
  L1 w0.2: C4.1 40,47.7 40.85,46.85 D1.2
NetC4_2: C4.2 C9.2 D3.1 IC2.1 L1.2 | length 84.4
  L1 w0.2: C9.2 1.8,11 v1(2.15,11) ; v1(2.15,45.525) IC2.1@3.2,44.475 ; IC2.1 IC2.1@3.2,44.475 ; D3.1 4.625,41.75 L1.2 2.9,44.175 IC2.1@3.2,44.475 ; C4.2 39.975,49.075 v1(40.675,49.075)
  L2 w0.2: v1(2.15,11) v1(2.15,45.525) 6.225,49.6 40.15,49.6 v1(40.675,49.075)
NetC5_2: C5.2 D1.1 R2.1 | length 5
  L1 w0.3: D1.1 43.45,48.45 45,46.9 C5.2 ; R2.1 45.275,45.675 C5.2@45.275,46.9
NetC9_1: C9.1 D2.2 | length 2.1
  L1 w0.3: C9.1 0.925,8.725 0.925,8.15 1.85,7.225 D2.2
NetC10_2: C10.2 D2.3 R4.1 | length 3.2
  L1 w0.3: C10.2 0.925,3.225 R4.1 2.4,4.225 2.8,4.625 D2.3
NetD4_1: D4.1 IC3.1 L2.2 | length 7.5
  L1 w0.3: D4.1 42.475,0.925 43.537,1.988 43.537,4.387 44.425,5.275 IC3.1 44.55,7.45 L2.2
NetIC1_5: IC1.5 R22.1 R23.1 | length 3.4
  L1 w0.3: IC1.5 12.3,38.725 12.875,39.3 R22.1 R23.1
NetIC2_3: IC2.3 R6.1 R8.1 | length 3
  L1 w0.3: R8.1 3.25,47.925 3.325,47.85 IC2.3
NetIC3_5: IC3.5 R18.1 R20.2 | length 7.3
  L1 w0.3: R18.1 R20.2 47.475,8.675 v1(47.625,8.525) ; IC3.5 v1(47.625,4.325)
  L4 w0.3: v1(47.625,4.325) v1(47.625,8.525)
NetJ1_8: J1.8 R1.2 | length 3.3
  L1 w0.2: v1(27.25,8.05) R1.2
  L4 w0.2: J1.8 v1(27.25,8.05)
R0: J1.35 J2.27 | length 42.6
  L1 w0.1: v2(21.725,42.7) J2.27
  L4 w0.1: J1.35 13.75,34.725 v2(21.725,42.7)
R1: J1.34 J2.26 | length 42.6
  L1 w0.1: v2(22.225,43.2) J2.26
  L4 w0.1: J1.34 14.25,34.7 22.225,42.675 v2(22.225,43.2)
R2: J1.33 J2.25 | length 42.6
  L1 w0.1: v2(22.725,42.7) J2.25
  L4 w0.1: J1.33 14.75,34.725 v2(22.725,42.7)
R3: J1.32 J2.24 | length 42.6
  L1 w0.1: v2(23.225,43.2) J2.24
  L4 w0.1: J1.32 15.25,34.675 23.225,42.65 v2(23.225,43.2)
R4: J1.31 J2.23 | length 42.6
  L1 w0.1: v2(23.725,42.7) J2.23
  L4 w0.1: J1.31 15.75,34.725 v2(23.725,42.7)
R5: J1.30 J2.22 | length 42.6
  L1 w0.1: v2(24.225,43.2) J2.22
  L4 w0.1: J1.30 16.25,34.675 24.225,42.65 v2(24.225,43.2)
R6: J1.29 J2.21 | length 42.6
  L1 w0.1: v2(24.725,42.7) J2.21
  L4 w0.1: J1.29 16.75,34.725 v2(24.725,42.7)
R7: J1.28 J2.20 | length 42.6
  L1 w0.1: v2(25.225,43.2) J2.20
  L4 w0.1: J1.28 17.25,34.71 25.225,42.685 v2(25.225,43.2)
RST/XR: J2.39 J6.4 | length 50.1
  L1 w0.1: J2.39 15.725,40.546 28.746,27.525 v1(28.75,27.525)
  L4 w0.1: v1(28.75,27.525) 28.75,15.9 39.375,5.275 J6.4
SCL/XL: J2.37 J6.1 R10.2 | length 50.3
  L1 w0.1: J2.37 16.725,40.575 v2(27.75,29.55) ; R10.2 36.05,6.925 v2(36.425,6.55)
  L4 w0.1: v2(27.75,29.55) 27.75,15.225 37.875,5.1 J6.1
SDA/YU: J2.38 J6.2 R11.2 | length 51.3
  L1 w0.1: J2.38 16.225,40.56 v2(28.255,28.53) ; R11.2 37.625,6.175 v2(37.9,5.9)
  L4 w0.1: v2@28.25,28.55 28.25,15.55 38.375,5.425 J6.2
U/D: J1.40 R16.2 R17.2 | length 7.9
  L1 w0.2: v1(11.25,7.3) 11.711,7.761 14.061,7.761 15,8.7 R16.2 R17.2
  L4 w0.2: J1.40 v1(11.25,7.3)
VGH: C11.2 C12.2 C13.2 D6.2 J1.41 R4.2 R5.2 | length 12.5
  L1 w0.2: R4.2 R5.2 D6.2 5.25,1.9 C11.2 C12.2 8.45,3.55 9.375,4.475 v1(10.976,4.475)
  L4 w0.3: J1.41 10.75,4.701 v1(10.976,4.475)
VGL: C6.2 C7.2 C8.2 D5.1 J1.42 R2.2 R3.2 | length 111
  L1 w0.2: C8.2@46.2,43.8 C8.2 C7.2 C6.2 R2.2 46.2,46.275 46.875,46.95 R3.2
  L1 w0.3: v1(46.125,42.775) C8.2 ; D5.1 v1(49.325,46.95)
  L2 w0.3: v1(10.25,3.85) 4.739,3.85 2.614,5.975 2.614,11.192 2.614,45.089 6.786,49.261 39.639,49.261 v1(46.125,42.775) 49.325,45.975 v1(49.325,46.95)
  L4 w0.3: v1(10.25,3.85) J1.42
VSYNC: J1.10 J2.34 | length 42.6
  L1 w0.1: J2.34 18.225,40.638 v2@26.238,32.625
  L4 w0.1: J1.10 v2(26.25,32.625)
pads on no net: J1.45 J1.49 J1.50 J2.MP1 J2.MP2

## Polygon pours and split planes (outlines as drawn)
BLGND on L1 "L1-BLGND" (solid, pour order 2): 40.25,0 50,0 50,10.5 40.25,10.5
GND on L3 "L3-GND" (solid, pour order 10): 0,0 0,50 50,50 50,0
BLGND on L3 "L3-BLGND" (solid, pour order 8): 40.25,0 50,0 50,10.5 40.25,10.5
3v3 on L2 "L2-3v3" (solid, pour order 11): 0,0 0,50 50,50 50,0

## Silkscreen, mask and mechanical layers (free items; w line width, h text height)
Top Overlay:
  text "TFT7" at 23.925,21.875 h2
  text "7\" TFT Module" at 20.259,20 h2
Mechanical 1:
  the board outline again, w0.1